# Altium PCB 超声波传感器.PcbDoc
Units mm, origin at the board's own origin, x right, y up, seen from the top; angles counter-clockwise.
Board outline 152.4 x 101.6 mm, 2 copper layers (Top Layer, Bottom Layer); 25 components, 22 nets, 85 pads, 9 vias.
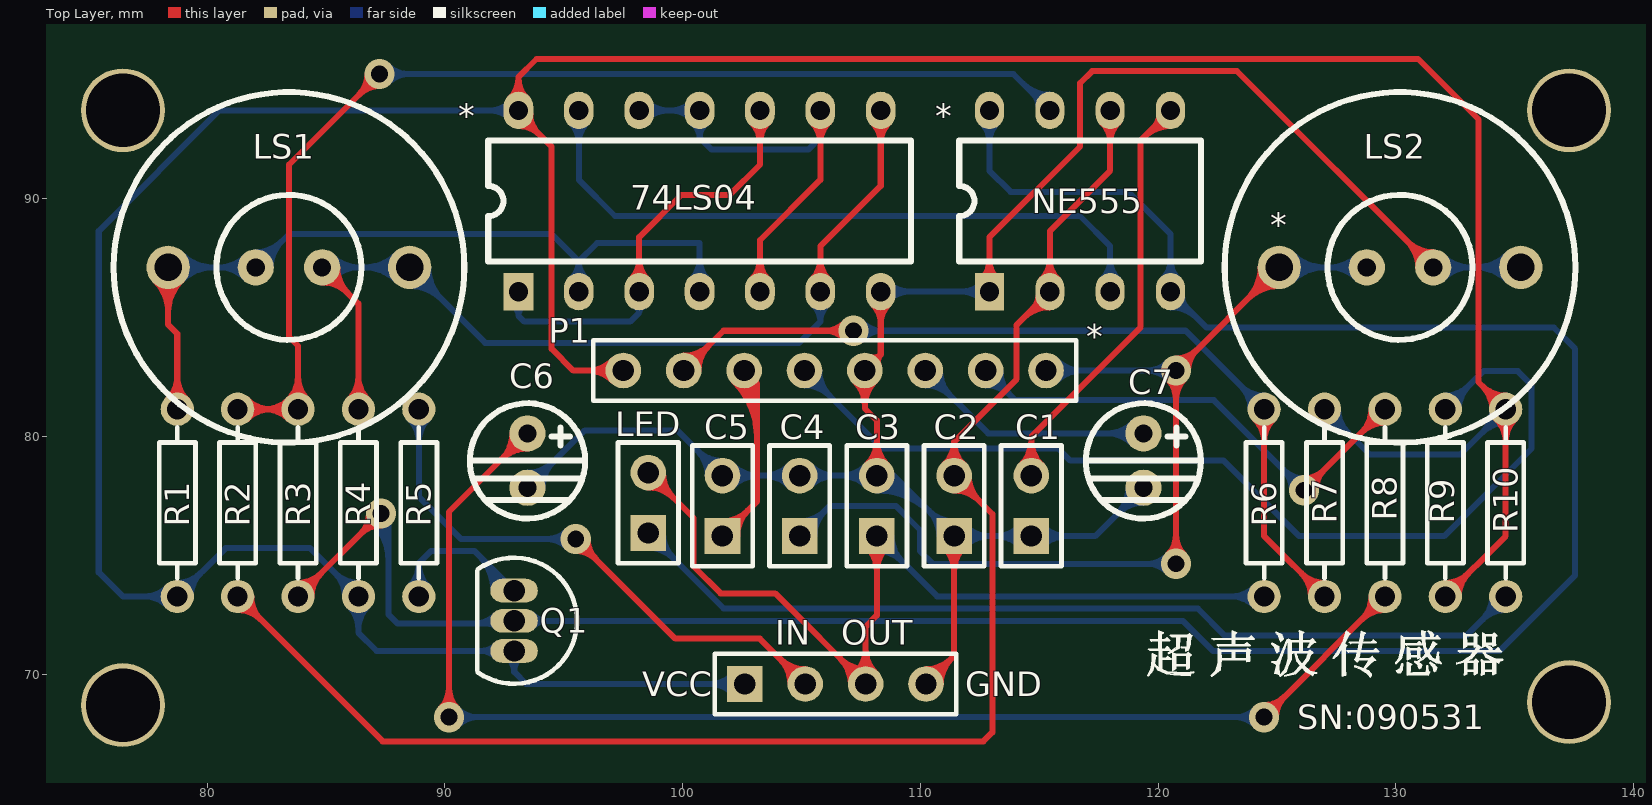
[diagram p0: Top Layer view]
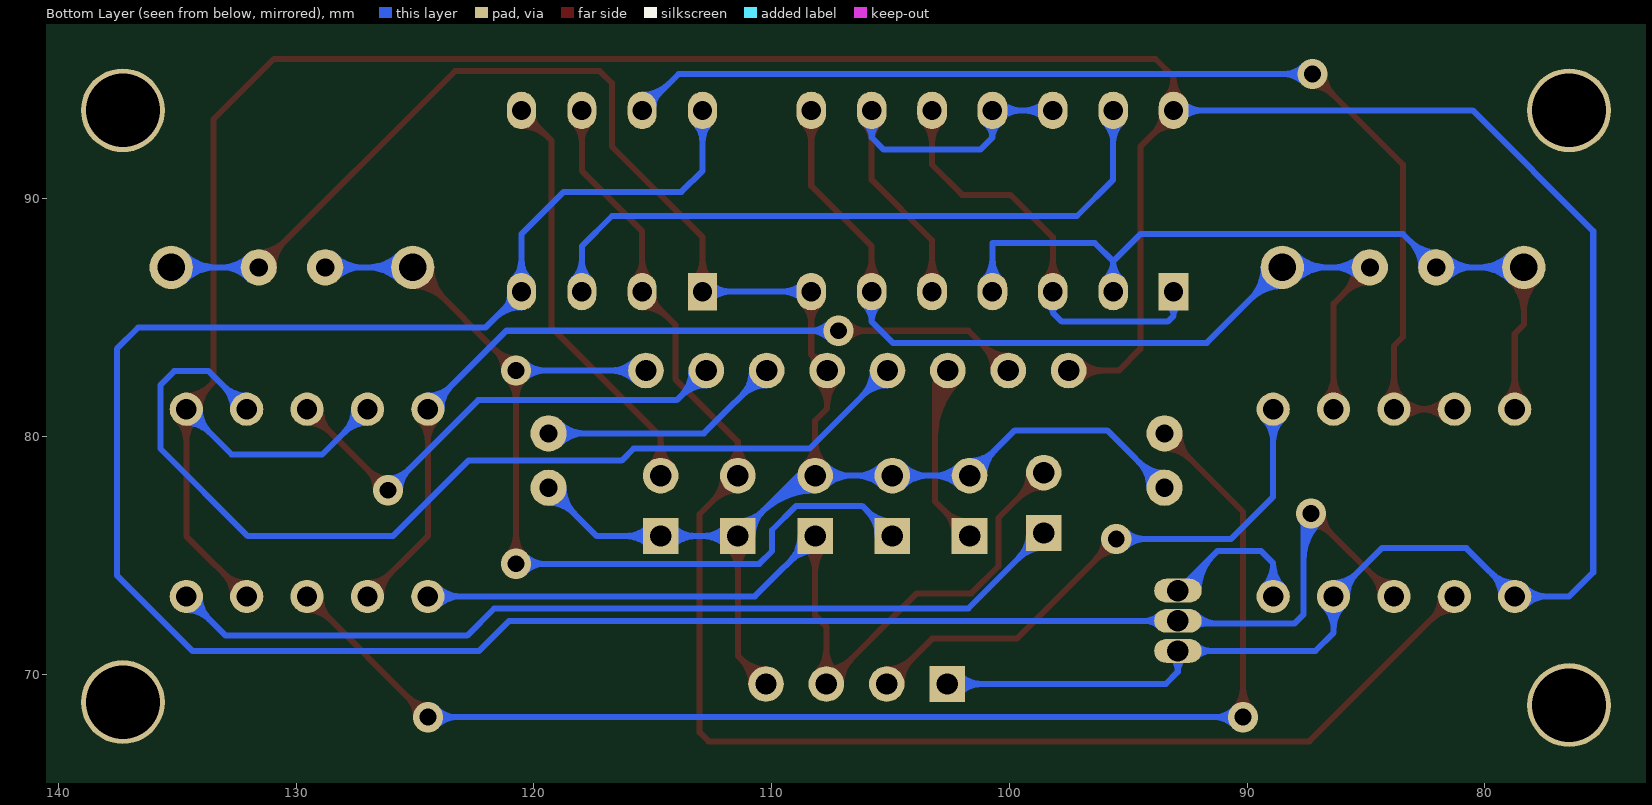
[diagram p1: Bottom Layer view, seen from below]

## Layer stack, top to bottom
Top Layer: signal copper 0.0356
Dielectric: dielectric 0.32, FR-4, Dk 4.8
Bottom Layer: signal copper 0.0356

## Board outline
25.4,25.4 177.8,25.4 177.8,127 25.4,127

## Design rules (kind name [scope] priority, off if disabled: settings)
Clearance [All] p1: gap=0.254
ComponentClearance [All] p1: gap=0.254 collisioncheckmode=3 verticalgap=0.254
PolygonConnect [All] p1: connectstyle=Relief reliefconductorwidth=0.254 reliefentries=4 polygonreliefangle="90 Angle"
RoutingVias [All] p1: holewidth=0.711 width=1.27 viastyle="Through Hole" minholewidth=0.711 minwidth=1.27 maxholewidth=0.711 maxwidth=1.27
SolderMaskExpansion [All] p1: expansion=0.102
TestPointUsage [All] p1: valid=0 allowmultiple=FALSE
Testpoint [All] p1: side=15 testpointundercomponent=TRUE minsize=1.016 maxsize=2.54 preferedsize=1.524 minholesize=0 maxholesize=1.016 preferedholesize=0.813 testpointgrid=0.025 style=1023 order=0-112345678
Width [All] p1: maxlimit=0.254 minlimit=0.254 preferedwidth=0.254
17 further rules are at their usual default settings.

## Components (designator, comment, footprint, x,y, rotation, side; value= is the part's Value field where it differs from the comment)
74LS04 "SN74LS04D" DIP14 93.091,86.106 r90 top (schematic designator U1)
C1 "Cap Semi" CPDR 114.665,77.089 r90 top
C2 "Cap Semi" CPDR 111.417,77.089 r90 top
C3 "Cap Semi" CPDR 108.169,77.089 r90 top
C4 "Cap Semi" CPDR 104.921,77.089 r90 top
C5 "Cap Semi" CPDR 101.673,77.089 r90 top
C6 "Cap Pol3" C-DJ-4 90.932,77.724 r270 top
C7 "Cap Pol3" C-DJ-4 116.84,77.724 r270 top
LED "LED" CPDR 98.552,77.216 r90 top
LS1 "Speaker" CSB 83.439,87.122 r0 top
LS2 "Speaker" CSB 130.175,87.122 r0 top
NE555 "NE555D" DIP8 112.903,86.106 r90 top (schematic designator U2)
P1 "Header 8H" HDR-8 102.616,82.804 r180 top
Q1 "2N3904" SANJG 91.44,74.676 r180 top
R1 "Res2" RSE 78.74,77.216 r270 top
R2 "Res3" RSE 81.28,77.216 r90 top
R3 "Res3" RSE 83.82,77.216 r90 top
R4 "Res2" RSE 86.36,77.216 r90 top
R5 "Res2" RSE 88.9,77.216 r90 top
R6 "Res2" RSE 124.46,77.216 r90 top
R7 "Res2" RSE 127,77.216 r90 top
R8 "Res2" RSE 129.54,77.216 r90 top
R9 "Res2" RSE 132.08,77.216 r90 top
R10 "Res2" RSE 134.62,77.216 r90 top
VCC "Header 4" HDR1X4 102.616,69.596 r0 top (schematic designator P2)

## Footprints (in the part's own frame and the unit in brackets; to place one, negate y for a bottom-side part, rotate by r counter-clockwise, add the part's x,y. Pads: shape width x height; smd on the part's side, far side on the other; paste and mask are expansions set on the pad)
C-DJ-4 [mil]
  round 60 hole 30: 1(-95,100) 2(-5,100)
  silkscreen extent -145,5 46,196
CPDR [mm] "瓷片电容"
  rect 1.5x1.5 hole 0.9: 1(-1.27,0)
  round 1.5 hole 0.9: 2(1.27,0)
  silkscreen extent -2.54,-1.27 2.54,1.27
CSB [mil] "超声波"
  round 60 hole 30: 1(55,0) 2(-55,0)
  round 71.81 hole 45.75: 1(200,0) 2(-200,0)
  silkscreen extent -290,-290 290,290
DIP8 [mil]
  rect 62x48 hole 32: 1(-0.15,-0.04)
  oval 62x48 hole 32: 2(-0.15,-100.04) 3(-0.15,-200.04) 4(-0.15,-300.04) 5(299.85,-300.04) 6(299.85,-200.04) 7(299.85,-100.04) 8(299.85,-0.04)
  silkscreen extent 50,-350 250,50
DIP14 [mil]
  rect 62x49.27 hole 32: 1(-0.15,-0.04)
  oval 62x49.27 hole 32: 2(-0.15,-100.04) 3(-0.15,-200.04) 4(-0.15,-300.04) 5(-0.15,-400.04) 6(-0.15,-500.04) 7(-0.15,-600.04) 8(299.85,-600.04) 9(299.85,-500.04) 10(299.85,-400.04) 11(299.85,-300.04) 12(299.85,-200.04) 13(299.85,-100.04) 14(299.85,-0.04)
  silkscreen extent 50,-650 250,50
HDR1X4 [mm] "Connector; Header; 4 Position"
  rect 1.5x1.5 hole 0.9: 1(0,0)
  round 1.5 hole 0.9: 2(2.54,0) 3(5.08,0) 4(7.62,0)
  silkscreen extent -1.27,-1.27 8.89,1.27
HDR-8 [mm]
  round 1.5 hole 0.9: 1(-12.669,0.023) 2(-10.129,0.023) 3(-7.589,0.023) 4(-5.049,0.023) 5(-2.509,0.023) 6(0.031,0.023) 7(2.571,0.023) 8(5.111,0.023)
  silkscreen extent -13.94,-1.25 6.38,1.29
RSE [mm] "直插电阻1/8W"
  round 1.4 hole 0.85: 1(-3.937,0) 2(3.937,0)
  silkscreen extent -3.17,-0.76 3.17,0.76
SANJG [mm]
  oval 2x1 hole 0.9: 1(-1.468,2.421) 2(-1.468,1.151) 3(-1.468,3.691)
  silkscreen extent -4.11,-0.23 0.08,5.07

## Part data
74LS04: "Hex Inverter"
C1 C2 C3 C4 C5: "Capacitor (Semiconductor SIM Model)"
C6 C7: "Polarized Capacitor (Surface Mount)"
LED: "发光二极管"
LS1 LS2: "Loudspeaker"
NE555: "Precision Timer"
P1: "Header, 8-Pin, Right Angle"
Q1: "NPN General Purpose Amplifier"
R1 R2 R3 R4 R5 R6 R7 R8 R9 R10: "Resistor"
VCC: "Header, 4-Pin"

## Free pads (board coordinates)
  round 3.524 hole 3.1: 0(76.454,68.707) 0(76.454,93.726) 0(137.287,68.834) 0(137.287,93.726)

## Via types
v1: diameter 1.27, hole 0.711, Top Layer to Bottom Layer, 9 vias

## Nets (pads, with @x,y where several pads share a name; then routed paths per layer and width w, separated by ;. In a path a pad name is that pad's centre, name@x,y a point inside that pad or via, vN(x,y) a via of type N, cw(c..) or ccw(c..) an arc to the next point about the centre after c; other vN are vias at no path point)
GND: 74LS04.7 C1.1 C2.1 C3.2 C4.2 C5.2 C6.2 C7.2 LS2.1 NE555.1 P1.4 VCC.4 | length 174.7
  Top Layer w0.254: P1.4@107.224,82.34 cw(c106.161,81.277) 107.665,81.277 cw(c109.169,81.277) P1.4@108.106,82.34 ; P1.4@107.404,82.52 cw(c106.774,81.89) 107.665,81.89 cw(c108.556,81.89) P1.4@107.926,82.52 ; C3.2@107.728,78.8 ccw(c106.665,79.863) 108.169,79.863 ccw(c109.673,79.863) C3.2@108.61,78.8 ; C3.2@107.908,78.62 ccw(c107.278,79.25) 108.169,79.25 ccw(c109.06,79.25) C3.2@108.43,78.62 ; 74LS04.7@107.979,85.588 cw(c107.128,84.736) 108.332,84.736 cw(c109.536,84.736) 74LS04.7@108.685,85.588 ; C3.2 108.169,80.68 107.665,81.184 P1.4 108.332,83.448 ; 74LS04.7 108.332,83.448 ; VCC.4 111.417,70.777 C2.1 ; VCC.4@110.236,69.965 ccw(c110.236,70.856) 110.866,70.226 ccw(c111.496,69.596) VCC.4@110.605,69.596 ; VCC.4@110.236,70.219 ccw(c110.236,71.723) 111.3,70.66 ccw(c112.363,69.596) VCC.4@110.859,69.596 ; C2.1@110.976,75.378 cw(c109.913,74.315) 111.417,74.315 cw(c112.921,74.315) C2.1@111.858,75.378 ; C2.1@111.156,75.558 cw(c110.526,74.928) 111.417,74.928 cw(c112.308,74.928) C2.1@111.678,75.558 ; NE555.1@112.563,86.621 ccw(c111.739,87.445) 112.904,87.445 ccw(c114.069,87.445) NE555.1@113.245,86.621 ; NE555.1 112.904,88.393 116.713,92.202 116.713,94.869 117.221,95.377 123.317,95.377 LS2.1@131.572,87.122 ; LS2.1@130.937,87.122 ccw(c129.404,87.122) 130.488,88.206 ccw(c131.572,89.29) LS2.1@131.572,87.757 ; LS2.1@131.191,87.122 ccw(c130.271,87.122) 130.922,87.772 ccw(c131.572,88.423) LS2.1@131.572,87.503 ; 108.332,83.448 cw(c108.047,83.733) 107.897,83.359 ccw(c108.047,83.733) 108.332,83.448 ; 108.332,83.448 ccw(c108.617,83.163) 108.243,83.013 cw(c108.617,83.163) 108.332,83.448
  Bottom Layer w0.254: C6.2 95.885,80.264 99.768,80.264 C5.2 C4.2 C3.2 108.877,78.359 C2.1 C1.1 117.348,75.819 C7.2 ; C6.2@93.472,78.232 ccw(c93.472,79.152) 94.122,78.501 ccw(c94.773,77.851) C6.2@93.853,77.851 ; C6.2@93.472,78.486 ccw(c93.472,80.019) 94.556,78.935 ccw(c95.64,77.851) C6.2@94.107,77.851 ; C5.2@101.05,78.359 ccw(c99.546,78.359) 100.609,79.423 ccw(c101.673,80.486) C5.2@101.673,78.982 ; C5.2@101.304,78.359 ccw(c100.413,78.359) 101.043,78.989 ccw(c101.673,79.619) C5.2@101.673,78.728 ; C5.2@101.934,78.098 cw(c102.564,77.468) 102.564,78.359 cw(c102.564,79.25) C5.2@101.934,78.62 ; C5.2@102.114,77.918 cw(c103.177,76.855) 103.177,78.359 cw(c103.177,79.863) C5.2@102.114,78.8 ; C4.2@104.48,77.918 ccw(c103.417,76.855) 103.417,78.359 ccw(c103.417,79.863) C4.2@104.48,78.8 ; C4.2@104.66,78.098 ccw(c104.03,77.468) 104.03,78.359 ccw(c104.03,79.25) C4.2@104.66,78.62 ; C4.2@105.182,78.098 cw(c105.812,77.468) 105.812,78.359 cw(c105.812,79.25) C4.2@105.182,78.62 ; C4.2@105.362,77.918 cw(c106.425,76.855) 106.425,78.359 cw(c106.425,79.863) C4.2@105.362,78.8 ; C3.2@107.728,77.918 ccw(c106.665,76.855) 106.665,78.359 ccw(c106.665,79.863) C3.2@107.728,78.8 ; C3.2@107.908,78.098 ccw(c107.278,77.468) 107.278,78.359 ccw(c107.278,79.25) C3.2@107.908,78.62 ; 74LS04.7 NE555.1 ; 74LS04.7@108.685,85.75 cw(c109.536,84.898) 109.536,86.102 cw(c109.536,87.306) 74LS04.7@108.685,86.455 ; C2.1@110.794,75.819 ccw(c109.29,75.819) 110.353,76.883 ccw(c111.417,77.946) C2.1@111.417,76.442 ; C2.1@111.048,75.819 ccw(c110.157,75.819) 110.787,76.449 ccw(c111.417,77.079) C2.1@111.417,76.188 ; C2.1@111.678,75.558 cw(c112.308,74.928) 112.308,75.819 cw(c112.308,76.71) C2.1@111.678,76.08 ; C2.1@111.858,75.378 cw(c112.921,74.315) 112.921,75.819 cw(c112.921,77.323) C2.1@111.858,76.26 ; NE555.1@112.563,85.761 ccw(c111.739,84.937) 111.739,86.102 ccw(c111.739,87.267) NE555.1@112.563,86.443 ; C1.1@114.224,75.378 ccw(c113.161,74.315) 113.161,75.819 ccw(c113.161,77.323) C1.1@114.224,76.26 ; C1.1@114.404,75.558 ccw(c113.774,74.928) 113.774,75.819 ccw(c113.774,76.71) C1.1@114.404,76.08 ; C1.1@114.926,75.558 cw(c115.556,74.928) 115.556,75.819 cw(c115.556,76.71) C1.1@114.926,76.08 ; C1.1@115.106,75.378 cw(c116.169,74.315) 116.169,75.819 cw(c116.169,77.323) C1.1@115.106,76.26 ; C7.2@118.745,77.851 cw(c117.212,77.851) 118.296,76.767 cw(c119.38,75.683) C7.2@119.38,77.216 ; C7.2@118.999,77.851 cw(c118.079,77.851) 118.73,77.201 cw(c119.38,76.55) C7.2@119.38,77.47 ; LS2.1@131.572,87.122 LS2.1@135.255,87.122 ; LS2.1@131.841,86.853 cw(c132.492,86.202) 132.492,87.122 cw(c132.492,88.042) LS2.1@131.841,87.391 ; LS2.1@132.021,86.673 cw(c133.105,85.589) 133.105,87.122 cw(c133.105,88.655) LS2.1@132.021,87.571 ; LS2.1@134.7,86.567 ccw(c133.36,85.227) 133.36,87.122 ccw(c133.36,89.017) LS2.1@134.7,87.677 ; LS2.1@134.88,86.747 ccw(c133.973,85.84) 133.973,87.122 ccw(c133.973,88.404) LS2.1@134.88,87.497 ; C3.2@108.169,77.736 cw(c108.169,74.523) 110.441,76.795 ccw(c108.169,74.523) C3.2@108.169,77.736 ; C3.2@108.169,77.99 cw(c108.169,75.39) 110.008,77.228 ccw(c108.169,75.39) C3.2@108.169,77.99 ; C3.2@108.169,78.244 cw(c108.169,76.257) 109.574,77.662 ccw(c108.169,76.257) C3.2@108.169,78.244 ; C3.2@108.169,78.498 cw(c108.169,77.124) 109.14,78.096 ccw(c108.169,77.124) C3.2@108.169,78.498
NetC1_2: C1.2 NE555.5 | length 24.2
  Top Layer w0.254: C1.2@114.224,78.8 ccw(c113.161,79.863) 114.665,79.863 ccw(c116.169,79.863) C1.2@115.106,78.8 ; C1.2@114.404,78.62 ccw(c113.774,79.25) 114.665,79.25 ccw(c115.556,79.25) C1.2@114.926,78.62 ; C1.2 114.665,79.994 119.253,84.582 119.253,92.451 NE555.5 ; 119.397,92.595 cw(c120.524,91.467) NE555.5@120.524,93.062 ; 119.826,93.024 ccw(c119.306,93.544) NE555.5@120.041,93.544 ; 119.83,93.028 cw(c120.524,92.335) NE555.5@120.524,93.316
NetC2_2: C2.2 NE555.2 NE555.6 R2.1 | length 80.9
  Top Layer w0.254: R2.1@81.28,72.706 cw(c81.28,71.323) 82.258,72.301 cw(c83.236,73.279) R2.1@81.853,73.279 ; R2.1@81.28,72.96 cw(c81.28,72.19) 81.825,72.734 cw(c82.369,73.279) R2.1@81.599,73.279 ; R2.1 87.376,67.183 112.649,67.183 113.03,67.564 113.03,76.746 C2.2 111.417,79.794 ; C2.2@110.992,78.814 ccw(c110.076,79.794) 111.417,79.794 ; C2.2@111.165,78.629 ccw(c110.623,79.209) 111.417,79.209 ccw(c112.211,79.209) C2.2@111.669,78.629 ; C2.2@111.417,77.736 cw(c111.417,76.232) 112.481,77.295 cw(c113.544,78.359) C2.2@112.04,78.359 ; C2.2@111.417,77.99 cw(c111.417,77.099) 112.047,77.729 cw(c112.677,78.359) C2.2@111.786,78.359 ; C2.2@111.842,78.814 cw(c112.758,79.794) 111.417,79.794 ; 114.317,84.975 cw(c115.444,83.847) NE555.2@115.444,85.442 ; 114.746,85.404 ccw(c114.226,85.924) NE555.2@114.961,85.924 ; 114.75,85.408 cw(c115.444,84.715) NE555.2@115.444,85.696 ; NE555.2@115.103,86.621 ccw(c114.279,87.445) 115.444,87.445 ccw(c116.609,87.445) NE555.2@115.785,86.621 ; NE555.6@117.643,93.203 cw(c116.819,92.379) 117.984,92.379 cw(c119.149,92.379) NE555.6@118.325,93.203 ; NE555.6 117.984,91.187 115.444,88.647 NE555.2 114.046,84.704 114.046,82.423 111.417,79.794
NetC3_1: C3.1 LED.2 R6.1 VCC.3 | length 60
  Top Layer w0.254: LED.2@98.552,77.863 cw(c98.552,76.359) 99.616,77.422 cw(c100.679,78.486) LED.2@99.175,78.486 ; LED.2@98.552,78.117 cw(c98.552,77.226) 99.182,77.856 cw(c99.812,78.486) LED.2@98.921,78.486 ; LED.2 100.457,76.581 100.457,74.549 101.6,73.406 103.886,73.406 VCC.3 107.696,72.009 108.169,72.482 C3.1 ; VCC.3@107.073,69.596 ccw(c105.569,69.596) 106.632,70.66 ccw(c107.696,71.723) VCC.3@107.696,70.219 ; VCC.3@107.255,70.037 ccw(c106.192,71.1) 107.696,71.1 ccw(c109.2,71.1) VCC.3@108.137,70.037 ; VCC.3@107.327,69.596 ccw(c106.436,69.596) 107.066,70.226 ccw(c107.696,70.856) VCC.3@107.696,69.965 ; VCC.3@107.435,69.857 ccw(c106.805,70.487) 107.696,70.487 ccw(c108.587,70.487) VCC.3@107.957,69.857 ; C3.1@107.728,75.378 cw(c106.665,74.315) 108.169,74.315 cw(c109.673,74.315) C3.1@108.61,75.378 ; C3.1@107.908,75.558 cw(c107.278,74.928) 108.169,74.928 cw(c109.06,74.928) C3.1@108.43,75.558
  Bottom Layer w0.254: C3.1@108.169,75.196 cw(c108.169,73.692) 109.233,74.755 cw(c110.296,75.819) C3.1@108.792,75.819 ; C3.1@108.169,75.45 cw(c108.169,74.559) 108.799,75.189 cw(c109.429,75.819) C3.1@108.538,75.819 ; C3.1 110.709,73.279 R6.1 ; R6.1@124.055,72.874 ccw(c123.077,71.896) 123.077,73.279 ccw(c123.077,74.662) R6.1@124.055,73.684 ; R6.1@124.234,73.053 ccw(c123.69,72.509) 123.69,73.279 ccw(c123.69,74.049) R6.1@124.234,73.505
NetC4_1: C4.1 LS2.2 P1.1 | length 72.3
  Top Layer w0.254: v1@120.395,75.012 ccw(c119.528,75.879) 120.754,75.879 ccw(c121.98,75.879) v1@121.113,75.012 ; v1@120.395,82.422 cw(c119.528,81.555) 120.754,81.555 cw(c121.98,81.555) v1@121.113,82.422 ; v1(120.754,74.653) v1(120.754,82.781) LS2.2@125.095,87.122 ; v1@120.754,83.289 ccw(c120.754,84.515) 121.621,83.648 ccw(c122.488,82.781) v1@121.262,82.781 ; LS2.2@124.31,87.122 cw(c122.415,87.122) 123.755,85.782 cw(c125.095,84.442) LS2.2@125.095,86.337 ; LS2.2@124.564,87.122 cw(c123.282,87.122) 124.189,86.216 cw(c125.095,85.309) LS2.2@125.095,86.591
  Bottom Layer w0.254: C4.1 106.191,77.089 108.966,77.089 109.982,76.073 109.982,75.184 110.513,74.653 v1(120.754,74.653) ; C4.1@104.921,76.188 ccw(c104.921,77.079) 105.551,76.449 ccw(c106.181,75.819) C4.1@105.29,75.819 ; C4.1@104.921,76.442 ccw(c104.921,77.946) 105.985,76.883 ccw(c107.048,75.819) C4.1@105.544,75.819 ; P1.1 v1(120.754,82.781) ; P1.1@115.546,82.52 cw(c116.176,81.89) 116.176,82.781 cw(c116.176,83.672) P1.1@115.546,83.042 ; P1.1@115.726,82.34 cw(c116.789,81.277) 116.789,82.781 cw(c116.789,84.285) P1.1@115.726,83.222 ; v1@120.395,74.294 ccw(c119.528,73.427) 119.528,74.653 ccw(c119.528,75.879) v1@120.395,75.012 ; v1@120.395,82.422 ccw(c119.528,81.555) 119.528,82.781 ccw(c119.528,84.007) v1@120.395,83.14 ; LS2.2@125.095,87.122 LS2.2@128.778,87.122 ; LS2.2@125.47,86.747 cw(c126.377,85.84) 126.377,87.122 cw(c126.377,88.404) LS2.2@125.47,87.497 ; LS2.2@125.65,86.567 cw(c126.99,85.227) 126.99,87.122 cw(c126.99,89.017) LS2.2@125.65,87.677 ; LS2.2@128.329,86.673 ccw(c127.245,85.589) 127.245,87.122 ccw(c127.245,88.655) LS2.2@128.329,87.571 ; LS2.2@128.509,86.853 ccw(c127.858,86.202) 127.858,87.122 ccw(c127.858,88.042) LS2.2@128.509,87.391
NetC5_1: C5.1 P1.6 | length 20
  Top Layer w0.254: C5.1 103.124,77.27 103.124,82.242 ; C5.1@101.673,76.188 ccw(c101.673,77.079) 102.303,76.449 ccw(c102.933,75.819) C5.1@102.042,75.819 ; C5.1@101.673,76.442 ccw(c101.673,77.946) 102.737,76.883 ccw(c103.8,75.819) C5.1@102.296,75.819 ; P1.6@102.144,82.34 cw(c99.78,79.976) 103.124,79.976 ; P1.6@102.324,82.52 cw(c100.393,80.589) 103.124,80.589 ; P1.6@102.504,82.7 cw(c101.006,81.202) 103.124,81.202 ; P1.6 103.124,82.242 ; P1.6@102.683,82.879 cw(c101.619,81.815) 103.124,81.815 ; 103.124,82.242 cw(c103.233,82.351) 103.104,82.437 ccw(c103.233,82.351) 103.124,82.242 ; 103.124,82.242 ccw(c103.015,82.133) 102.929,82.262 cw(c103.015,82.133) 103.124,82.242
NetC6_1: C6.1 R8.1 | length 69.7
  Top Layer w0.254: v1@89.811,68.558 ccw(c88.944,69.425) 90.17,69.425 ccw(c91.396,69.425) v1@90.529,68.558 ; v1(90.17,68.199) 90.17,76.835 C6.1 ; C6.1@92.837,80.137 cw(c91.304,80.137) 92.388,79.053 cw(c93.472,77.969) C6.1@93.472,79.502 ; C6.1@93.091,80.137 cw(c92.171,80.137) 92.822,79.487 cw(c93.472,78.836) C6.1@93.472,79.756 ; v1(124.46,68.199) R8.1 ; v1@124.46,68.707 ccw(c124.46,69.933) 125.327,69.066 ccw(c126.194,68.199) v1@124.968,68.199 ; R8.1@128.967,73.279 cw(c127.584,73.279) 128.562,72.301 cw(c129.54,71.323) R8.1@129.54,72.706 ; R8.1@129.221,73.279 cw(c128.451,73.279) 128.995,72.734 cw(c129.54,72.19) R8.1@129.54,72.96
  Bottom Layer w0.254: v1(90.17,68.199) v1(124.46,68.199) ; v1@90.529,67.84 cw(c91.396,66.973) 91.396,68.199 cw(c91.396,69.425) v1@90.529,68.558 ; v1@124.101,67.84 ccw(c123.234,66.973) 123.234,68.199 ccw(c123.234,69.425) v1@124.101,68.558
NetC7_1: C7.1 P1.3 | length 17.9
  Bottom Layer w0.254: P1.3@110.205,82.158 cw(c110.205,80.654) 111.269,81.717 cw(c112.332,82.781) P1.3@110.828,82.781 ; P1.3@110.205,82.412 cw(c110.205,81.521) 110.835,82.151 cw(c111.465,82.781) P1.3@110.574,82.781 ; P1.3 112.849,80.137 C7.1 ; C7.1@118.931,79.688 ccw(c117.847,78.604) 117.847,80.137 ccw(c117.847,81.67) C7.1@118.931,80.586 ; C7.1@119.111,79.868 ccw(c118.46,79.217) 118.46,80.137 ccw(c118.46,81.057) C7.1@119.111,80.406
NetLED_1: LED.1 R10.1 | length 45.7
  Bottom Layer w0.254: LED.1@98.552,75.323 cw(c98.552,73.819) 99.616,74.882 cw(c100.679,75.946) LED.1@99.175,75.946 ; LED.1@98.552,75.577 cw(c98.552,74.686) 99.182,75.316 cw(c99.812,75.946) LED.1@98.921,75.946 ; LED.1 101.727,72.771 121.666,72.771 122.809,71.628 132.969,71.628 R10.1 ; R10.1@134.047,73.279 cw(c132.664,73.279) 133.642,72.301 cw(c134.62,71.323) R10.1@134.62,72.706 ; R10.1@134.301,73.279 cw(c133.531,73.279) 134.075,72.734 cw(c134.62,72.19) R10.1@134.62,72.96
NetLS1_1: 74LS04.6 74LS04.8 LS1.1 R4.2 | length 65.7
  Top Layer w0.254: LS1.1@84.836,86.487 cw(c84.836,84.954) 85.92,86.038 cw(c87.004,87.122) LS1.1@85.471,87.122 ; LS1.1@84.836,86.741 cw(c84.836,85.821) 85.486,86.472 cw(c86.137,87.122) LS1.1@85.217,87.122 ; LS1.1@84.836,87.122 86.36,85.598 R4.2 ; R4.2@85.955,81.558 ccw(c84.977,82.536) 86.36,82.536 ccw(c87.743,82.536) R4.2@86.765,81.558 ; R4.2@86.134,81.379 ccw(c85.59,81.923) 86.36,81.923 ccw(c87.13,81.923) R4.2@86.586,81.379 ; 74LS04.6@105.439,86.617 ccw(c104.588,87.468) 105.792,87.468 ccw(c106.996,87.468) 74LS04.6@106.145,86.617 ; 74LS04.6 105.792,88.012 108.332,90.552 74LS04.8 ; 74LS04.8@107.979,93.208 cw(c107.128,92.356) 108.332,92.356 cw(c109.536,92.356) 74LS04.8@108.685,93.208
  Bottom Layer w0.254: LS1.1@84.836,87.122 88.519,87.122 91.694,83.947 104.902,83.947 105.792,84.837 ; LS1.1@85.105,86.853 cw(c85.756,86.202) 85.756,87.122 cw(c85.756,88.042) LS1.1@85.105,87.391 ; LS1.1@85.285,86.673 cw(c86.369,85.589) 86.369,87.122 cw(c86.369,88.655) LS1.1@85.285,87.571 ; LS1.1@87.964,86.567 ccw(c86.624,85.227) 86.624,87.122 ccw(c86.624,89.017) LS1.1@87.964,87.677 ; LS1.1@88.144,86.747 ccw(c87.237,85.84) 87.237,87.122 ccw(c87.237,88.404) LS1.1@88.144,87.497 ; LS1.1@88.519,86.337 cw(c88.519,84.442) 89.859,85.782 cw(c91.199,87.122) LS1.1@89.304,87.122 ; LS1.1@88.519,86.591 cw(c88.519,85.309) 89.425,86.216 cw(c90.332,87.122) LS1.1@89.05,87.122 ; 74LS04.6@105.462,85.566 cw(c104.821,84.837) 105.792,84.837 ; 74LS04.6 105.792,84.837 ; 74LS04.6@106.122,85.566 ccw(c106.763,84.837) 105.792,84.837
NetLS1_2: 74LS04.2 74LS04.4 LS1.2 R1.1 | length 57.8
  Top Layer w0.254: LS1.2@77.804,86.567 cw(c76.464,85.227) 78.359,85.227 cw(c80.254,85.227) LS1.2@78.914,86.567 ; LS1.2@77.984,86.747 cw(c77.077,85.84) 78.359,85.84 cw(c79.641,85.84) LS1.2@78.734,86.747 ; R1.1@78.335,81.558 ccw(c77.357,82.536) 78.74,82.536 ccw(c80.123,82.536) R1.1@79.145,81.558 ; LS1.2@78.359,87.122 78.359,84.709 78.74,84.328 R1.1 ; R1.1@78.514,81.379 ccw(c77.97,81.923) 78.74,81.923 ccw(c79.51,81.923) R1.1@78.966,81.379
  Bottom Layer w0.254: LS1.2@78.359,87.122 82.042,87.122 83.439,88.519 94.489,88.519 95.632,87.376 ; LS1.2@78.734,86.747 cw(c79.641,85.84) 79.641,87.122 cw(c79.641,88.404) LS1.2@78.734,87.497 ; LS1.2@78.914,86.567 cw(c80.254,85.227) 80.254,87.122 cw(c80.254,89.017) LS1.2@78.914,87.677 ; LS1.2@81.593,86.673 ccw(c80.509,85.589) 80.509,87.122 ccw(c80.509,88.655) LS1.2@81.593,87.571 ; LS1.2@81.773,86.853 ccw(c81.122,86.202) 81.122,87.122 ccw(c81.122,88.042) LS1.2@81.773,87.391 ; LS1.2@82.042,87.503 ccw(c82.042,88.423) 82.692,87.772 ccw(c83.343,87.122) LS1.2@82.423,87.122 ; LS1.2@82.042,87.757 ccw(c82.042,89.29) 83.126,88.206 ccw(c84.21,87.122) LS1.2@82.677,87.122 ; 74LS04.2@95.3,86.636 ccw(c94.641,87.376) 95.632,87.376 ; 74LS04.2 95.632,87.376 ; 74LS04.2@95.964,86.636 cw(c96.623,87.376) 95.632,87.376 ; 74LS04.4@100.359,86.617 ccw(c99.508,87.468) 100.712,87.468 ccw(c101.916,87.468) 74LS04.4@101.065,86.617 ; 74LS04.4 100.712,88.137 100.71,88.139 96.395,88.139 95.632,87.376
NetP1_2: P1.2 R8.2 | length 31.3
  Top Layer w0.254: v1(126.131,77.744) R8.2 ; v1@126.131,78.252 ccw(c126.131,79.479) 126.998,78.611 ccw(c127.866,77.744) v1@126.639,77.744 ; R8.2@128.967,81.153 cw(c127.584,81.153) 128.562,80.175 cw(c129.54,79.197) R8.2@129.54,80.58 ; R8.2@129.221,81.153 cw(c128.451,81.153) 128.995,80.608 cw(c129.54,80.064) R8.2@129.54,80.834
  Bottom Layer w0.254: P1.2@112.745,82.158 cw(c112.745,80.654) 113.809,81.717 cw(c114.872,82.781) P1.2@113.368,82.781 ; P1.2@112.745,82.412 cw(c112.745,81.521) 113.375,82.151 cw(c114.005,82.781) P1.2@113.114,82.781 ; P1.2 113.992,81.534 122.341,81.534 v1(126.131,77.744) ; v1@125.623,77.744 ccw(c124.397,77.744) 125.264,78.611 ccw(c126.131,79.479) v1@126.131,78.252
NetP1_5: P1.5 R9.2 | length 49.3
  Bottom Layer w0.254: P1.5@105.125,82.158 cw(c105.125,80.654) 106.189,81.717 cw(c107.252,82.781) P1.5@105.748,82.781 ; P1.5@105.125,82.412 cw(c105.125,81.521) 105.755,82.151 cw(c106.385,82.781) P1.5@105.494,82.781 ; P1.5 108.404,79.502 115.799,79.502 116.307,78.994 122.758,78.994 125.933,75.819 132.029,75.819 135.712,79.502 135.712,82.169 135.128,82.753 133.68,82.753 R9.2 ; R9.2@132.08,81.472 ccw(c132.08,82.242) 132.625,81.698 ccw(c133.169,81.153) R9.2@132.399,81.153 ; R9.2@132.08,81.726 ccw(c132.08,83.109) 133.058,82.131 ccw(c134.036,81.153) R9.2@132.653,81.153
NetP1_7: P1.7 R6.2 R7.1 | length 53.2
  Top Layer w0.254: P1.7 101.719,84.455 v1(107.188,84.455) ; P1.7@100.045,83.15 ccw(c100.045,84.041) 100.675,83.411 ccw(c101.305,82.781) P1.7@100.414,82.781 ; P1.7@100.045,83.404 ccw(c100.045,84.908) 101.109,83.845 ccw(c102.172,82.781) P1.7@100.668,82.781 ; v1@106.829,84.096 ccw(c105.962,83.229) 105.962,84.455 ccw(c105.962,85.681) v1@106.829,84.814 ; R6.2@124.055,80.748 cw(c123.077,79.77) 124.46,79.77 cw(c125.843,79.77) R6.2@124.865,80.748 ; R6.2@124.234,80.927 cw(c123.69,80.383) 124.46,80.383 cw(c125.23,80.383) R6.2@124.686,80.927 ; R6.2 124.46,75.819 R7.1 ; R7.1@126.427,73.279 ccw(c125.044,73.279) 126.022,74.257 ccw(c127,75.235) R7.1@127,73.852 ; R7.1@126.681,73.279 ccw(c125.911,73.279) 126.455,73.824 ccw(c127,74.368) R7.1@127,73.598
  Bottom Layer w0.254: v1(107.188,84.455) 121.158,84.455 R6.2 ; v1@107.547,84.096 cw(c108.414,83.229) 108.414,84.455 cw(c108.414,85.681) v1@107.547,84.814 ; R6.2@123.887,81.153 ccw(c122.504,81.153) 123.482,82.131 ccw(c124.46,83.109) R6.2@124.46,81.726 ; R6.2@124.141,81.153 ccw(c123.371,81.153) 123.915,81.698 ccw(c124.46,82.242) R6.2@124.46,81.472
NetP2_2: R5.2 VCC.2 | length 34.2
  Top Layer w0.254: v1@95.504,75.184 cw(c95.504,73.958) 96.371,74.825 cw(c97.238,75.692) v1@96.012,75.692 ; v1(95.504,75.692) 99.695,71.501 103.251,71.501 VCC.2 ; VCC.2@104.533,69.596 ccw(c103.029,69.596) 104.092,70.66 ccw(c105.156,71.723) VCC.2@105.156,70.219 ; VCC.2@104.787,69.596 ccw(c103.896,69.596) 104.526,70.226 ccw(c105.156,70.856) VCC.2@105.156,69.965
  Bottom Layer w0.254: R5.2@88.495,80.748 cw(c87.517,79.77) 88.9,79.77 cw(c90.283,79.77) R5.2@89.305,80.748 ; R5.2@88.674,80.927 cw(c88.13,80.383) 88.9,80.383 cw(c89.67,80.383) R5.2@89.126,80.927 ; R5.2 88.9,77.47 90.678,75.692 v1(95.504,75.692) ; v1@95.145,75.333 ccw(c94.278,74.466) 94.278,75.692 ccw(c94.278,76.918) v1@95.145,76.051
NetQ1_1: NE555.4 NE555.8 Q1.1 R3.1 | length 121.4
  Top Layer w0.254: R3.1 v1(87.312,76.772) ; R3.1@83.82,73.598 ccw(c83.82,74.368) 84.365,73.824 ccw(c84.909,73.279) R3.1@84.139,73.279 ; R3.1@83.82,73.852 ccw(c83.82,75.235) 84.798,74.257 ccw(c85.776,73.279) R3.1@84.393,73.279 ; v1@86.804,76.772 cw(c85.578,76.772) 86.445,75.904 cw(c87.312,75.037) v1@87.312,76.263
  Bottom Layer w0.254: v1@86.953,76.412 cw(c85.32,74.779) 87.63,74.779 ; v1@87.133,76.592 cw(c85.933,75.392) 87.63,75.392 ; 87.63,76.005 ccw(c86.546,76.005) v1(87.312,76.772) 87.63,76.454 87.63,72.517 88.011,72.136 92.789,72.136 Q1.1 121.039,72.255 122.301,70.993 134.366,70.993 137.541,74.168 137.541,83.693 136.652,84.582 122.044,84.582 NE555.4 120.524,88.518 118.745,90.297 113.792,90.297 112.904,91.185 NE555.8 ; 91.219,72.136 ccw(c91.219,73.444) Q1.1@92.144,72.519 ; 91.795,72.136 cw(c91.795,71.643) Q1.1@92.144,71.992 ; 91.833,72.136 ccw(c91.833,72.831) Q1.1@92.324,72.339 ; Q1.1@93.672,71.992 cw(c94.308,71.355) 94.308,72.255 cw(c94.308,73.156) Q1.1@93.672,72.519 ; NE555.8@112.563,93.203 cw(c111.739,92.379) 112.904,92.379 cw(c114.069,92.379) NE555.8@113.245,93.203 ; NE555.4@120.183,86.621 ccw(c119.359,87.445) 120.524,87.445 ccw(c121.689,87.445) NE555.4@120.865,86.621 ; NE555.4@120.524,85.442 cw(c120.524,83.847) 121.651,84.975 ; NE555.4@120.524,85.696 cw(c120.524,84.715) 121.218,85.408 ; NE555.4@121.007,85.924 ccw(c121.742,85.924) 121.222,85.404
NetQ1_2: Q1.2 R5.1 | length 13.2
  Bottom Layer w0.254: R5.1@88.495,73.684 ccw(c87.517,74.662) 88.9,74.662 ccw(c90.283,74.662) R5.1@89.305,73.684 ; R5.1@88.674,73.505 ccw(c88.13,74.049) 88.9,74.049 ccw(c89.67,74.049) R5.1@89.126,73.505 ; R5.1 88.9,74.676 89.408,75.184 91.249,75.184 Q1.2 ; 91.418,75.016 cw(c89.927,73.525) Q1.2@92.035,73.525 ; 91.851,74.582 cw(c90.794,73.525) Q1.2@92.289,73.525 ; 92.285,74.148 cw(c91.662,73.525) Q1.2@92.543,73.525
NetR2_2: NE555.7 R2.2 R3.2 | length 63.8
  Top Layer w0.254: R2.2 R3.2 83.82,83.82 83.439,84.201 83.439,91.44 v1(87.249,95.25) ; R2.2@81.506,80.927 cw(c82.05,80.383) 82.05,81.153 cw(c82.05,81.923) R2.2@81.506,81.379 ; R2.2@81.685,80.748 cw(c82.663,79.77) 82.663,81.153 cw(c82.663,82.536) R2.2@81.685,81.558 ; R3.2@83.415,80.748 ccw(c82.437,79.77) 82.437,81.153 ccw(c82.437,82.536) 83.415,81.558 ccw(c82.437,82.536) 83.82,82.536 ccw(c85.203,82.536) R3.2@84.225,81.558 ; R3.2@83.594,80.927 ccw(c83.05,80.383) 83.05,81.153 ccw(c83.05,81.923) 83.594,81.379 ccw(c83.05,81.923) 83.82,81.923 ccw(c84.59,81.923) R3.2@84.046,81.379 ; v1@86.741,95.25 cw(c85.515,95.25) 86.382,94.383 cw(c87.249,93.516) v1@87.249,94.742
  Bottom Layer w0.254: v1(87.249,95.25) 113.916,95.25 NE555.7 ; v1@87.608,94.891 cw(c88.475,94.024) 88.475,95.25 cw(c88.475,96.476) v1@87.608,95.609 ; 114.317,94.85 ccw(c115.444,95.977) NE555.7@115.444,94.383 ; 114.746,94.42 cw(c114.226,93.9) NE555.7@114.961,93.9 ; 114.75,94.416 ccw(c115.444,95.11) NE555.7@115.444,94.129
NetU1_1: 74LS04.1 74LS04.3 74LS04.10 | length 25.3
  Top Layer w0.254: 74LS04.3@97.819,86.617 ccw(c96.968,87.468) 98.172,87.468 ccw(c99.376,87.468) 74LS04.3@98.525,86.617 ; 74LS04.3 98.172,88.393 99.95,90.171 101.983,90.171 103.252,91.44 74LS04.10 ; 74LS04.10@102.899,93.208 cw(c102.048,92.356) 103.252,92.356 cw(c104.456,92.356) 74LS04.10@103.605,93.208
  Bottom Layer w0.254: 74LS04.1 93.092,85.089 ; 74LS04.3 98.172,85.219 ; 93.092,85.089 cw(c93.57,85.089) 93.336,85.506 ccw(c93.57,85.089) 93.092,85.089 ; 93.092,85.089 ccw(c92.614,85.089) 92.848,85.506 cw(c92.614,85.089) 93.092,85.089 ; 93.092,85.089 93.344,84.837 97.79,84.837 98.172,85.219 ; 98.172,85.219 cw(c98.444,85.219) 98.348,85.474 ccw(c98.444,85.219) 98.172,85.219 ; 98.172,85.219 ccw(c97.9,85.219) 97.996,85.474 cw(c97.9,85.219) 98.172,85.219
NetU1_5: 74LS04.5 74LS04.9 74LS04.11 74LS04.12 | length 31.9
  Top Layer w0.254: 74LS04.5@102.899,86.617 ccw(c102.048,87.468) 103.252,87.468 ccw(c104.456,87.468) 74LS04.5@103.605,86.617 ; 74LS04.5 103.252,88.266 105.792,90.806 74LS04.9 ; 74LS04.9@105.439,93.208 cw(c104.588,92.356) 105.792,92.356 cw(c106.996,92.356) 74LS04.9@106.145,93.208
  Bottom Layer w0.254: 74LS04.12 74LS04.11 100.712,92.582 ; 74LS04.12@98.525,93.37 cw(c99.376,92.518) 99.376,93.722 cw(c99.376,94.926) 74LS04.12@98.525,94.075 ; 74LS04.11@100.359,93.37 ccw(c99.508,92.518) 99.508,93.722 ccw(c99.508,94.926) 74LS04.11@100.359,94.075 ; 74LS04.9 105.792,92.584 ; 100.712,92.582 cw(c101.423,92.582) 101.005,93.157 ccw(c101.423,92.582) 100.712,92.582 ; 100.712,92.582 ccw(c100.001,92.582) 100.419,93.157 cw(c100.001,92.582) 100.712,92.582 ; 100.712,92.582 101.219,92.075 105.283,92.075 105.792,92.584 ; 105.792,92.584 cw(c106.499,92.584) 106.084,93.156 ccw(c106.499,92.584) 105.792,92.584 ; 105.792,92.584 ccw(c105.085,92.584) 105.5,93.156 cw(c105.085,92.584) 105.792,92.584
NetU1_13: 74LS04.13 NE555.3 | length 32.1
  Bottom Layer w0.254: 74LS04.13@95.279,93.208 cw(c94.428,92.356) 95.632,92.356 cw(c96.836,92.356) 74LS04.13@95.985,93.208 ; 74LS04.13 95.632,90.804 97.155,89.281 116.713,89.281 117.984,88.01 NE555.3 ; NE555.3@117.643,86.621 ccw(c116.819,87.445) 117.984,87.445 ccw(c119.149,87.445) NE555.3@118.325,86.621
VCC: 74LS04.14 P1.8 Q1.3 R1.2 R4.1 R7.2 R9.1 R10.2 VCC.1 | length 201.2
  Top Layer w0.254: 74LS04.14@92.739,94.237 ccw(c91.888,95.088) 93.092,95.088 ccw(c94.296,95.088) 74LS04.14@93.445,94.237 ; 74LS04.14@93.092,93.062 cw(c93.092,91.767) 94.007,92.683 ; 74LS04.14@93.092,93.316 cw(c93.092,92.635) 93.574,93.116 ; 74LS04.14@93.591,93.561 ccw(c94.704,93.561) 93.917,92.773 ; P1.8@97.064,82.34 ccw(c96.001,81.277) 96.001,82.781 ccw(c96.001,84.285) P1.8@97.064,83.222 ; P1.8@97.244,82.52 ccw(c96.614,81.89) 96.614,82.781 ccw(c96.614,83.672) P1.8@97.244,83.042 ; P1.8 95.4,82.781 94.488,83.693 94.488,92.202 93.092,93.598 74LS04.14 93.092,95.124 93.853,95.885 130.937,95.885 133.477,93.345 133.477,82.296 R10.2 134.62,75.819 R9.1 ; R9.1@132.08,73.598 ccw(c132.08,74.368) 132.625,73.824 ccw(c133.169,73.279) R9.1@132.399,73.279 ; R9.1@132.08,73.852 ccw(c132.08,75.235) 133.058,74.257 ccw(c134.036,73.279) R9.1@132.653,73.279 ; R10.2@134.047,81.153 ccw(c132.664,81.153) 133.642,82.131 ccw(c134.62,83.109) R10.2@134.62,81.726 ; R10.2@134.215,80.748 cw(c133.237,79.77) 134.62,79.77 cw(c136.003,79.77) R10.2@135.025,80.748 ; R10.2@134.301,81.153 ccw(c133.531,81.153) 134.075,81.698 ccw(c134.62,82.242) R10.2@134.62,81.472 ; R10.2@134.394,80.927 cw(c133.85,80.383) 134.62,80.383 cw(c135.39,80.383) R10.2@134.846,80.927
  Bottom Layer w0.254: R1.2@78.335,72.874 ccw(c77.357,71.896) 77.357,73.279 ccw(c77.357,74.662) R1.2@78.335,73.684 ; R1.2@78.514,73.053 ccw(c77.97,72.509) 77.97,73.279 ccw(c77.97,74.049) R1.2@78.514,73.505 ; R1.2@78.74,73.598 ccw(c78.74,74.368) 79.285,73.824 ccw(c79.829,73.279) R1.2@79.059,73.279 ; R1.2@78.74,73.852 ccw(c78.74,75.235) 79.718,74.257 ccw(c80.696,73.279) R1.2@79.313,73.279 ; R4.1@85.787,73.279 ccw(c84.404,73.279) 85.382,74.257 ccw(c86.36,75.235) R4.1@86.36,73.852 ; R4.1@85.955,72.874 cw(c84.977,71.896) 86.36,71.896 cw(c87.743,71.896) R4.1@86.765,72.874 ; R4.1@86.041,73.279 ccw(c85.271,73.279) 85.815,73.824 ccw(c86.36,74.368) R4.1@86.36,73.598 ; R4.1@86.134,73.053 cw(c85.59,72.509) 86.36,72.509 cw(c87.13,72.509) R4.1@86.586,73.053 ; Q1.3@92.144,70.722 ccw(c91.507,70.085) 91.507,70.985 ccw(c91.507,71.886) Q1.3@92.144,71.249 ; Q1.3@92.648,70.718 cw(c92.053,70.104) 92.908,70.104 ; 74LS04.14@92.739,93.37 ccw(c91.888,92.518) 91.888,93.722 ccw(c91.888,94.926) 74LS04.14@92.739,94.075 ; 74LS04.14 80.514,93.722 75.438,88.646 75.438,74.295 76.454,73.279 R1.2 80.772,75.311 84.328,75.311 R4.1 86.36,71.755 87.13,70.985 Q1.3 92.908,70.104 ; Q1.3@93.167,70.718 ccw(c93.762,70.104) 92.908,70.104 ; VCC.1@102.175,69.155 ccw(c101.112,68.092) 101.112,69.596 ccw(c101.112,71.1) VCC.1@102.175,70.037 ; VCC.1@102.355,69.335 ccw(c101.725,68.705) 101.725,69.596 ccw(c101.725,70.487) VCC.1@102.355,69.857 ; VCC.1 93.416,69.596 92.908,70.104 ; R7.2@127,80.58 cw(c127,79.197) 127.978,80.175 cw(c128.956,81.153) R7.2@127.573,81.153 ; R7.2@127,80.834 cw(c127,80.064) 127.545,80.608 cw(c128.089,81.153) R7.2@127.319,81.153 ; R7.2 128.905,79.248 132.715,79.248 R10.2 ; R10.2@134.047,81.153 cw(c132.664,81.153) 133.642,80.175 cw(c134.62,79.197) R10.2@134.62,80.58 ; R10.2@134.301,81.153 cw(c133.531,81.153) 134.075,80.608 cw(c134.62,80.064) R10.2@134.62,80.834

## Silkscreen, mask and mechanical layers (free items; w line width, h text height)
Top Overlay:
  drawing of 1199 lines, arcs and shapes, not listed
  text "*" at 90.551,92.964 h1.02
  text "*" at 110.617,92.964 h1.02
  text "*" at 124.714,88.392 h1.02
  text "*" at 116.967,83.693 h1.02
  text "IN" at 103.886,71.247 h1.02
  text "OUT" at 106.68,71.247 h1.02
  text "GND" at 111.887,69.088 h1.02
  text "SN:090531" at 125.857,67.691 h1.02
Mechanical 1:
  lines w0.254: 70.739,67.668 71.247,66.144 ; 70.739,94.846 71.247,96.37 ; 70.993,66.144 71.501,66.144 ; 70.993,96.37 71.501,96.37 ; 71.247,73.233 71.247,66.144 ; 71.247,89.281 71.247,96.37 ; 71.755,67.668 71.247,66.144 ; 71.755,94.846 71.247,96.37 ; 73.684,98.878 73.685,99.386 ; 75.208,98.621 73.684,99.132 ; 75.209,99.637 73.684,99.132 ; 97.919,99.086 73.684,99.132 ; 115.236,99.052 139.47,99.005 ; 137.946,98.5 139.47,99.005 ; 137.947,99.516 139.47,99.005 ; 139.47,98.751 139.471,99.259 ; 139.954,93.98 139.954,95.377 138.811,96.52 137.541,96.52 76.454,96.52 75.184,96.52 75.057,96.393 73.787,95.123 73.787,93.853 73.787,68.834 73.787,67.31 74.93,66.167 76.327,66.167 137.541,66.167 138.811,66.167 139.954,67.31 139.954,68.58 139.954,94.107
  text "65.7861 (mm)" at 98.171,98.171 h1.52 r359.89
  text "30.226 (mm)" at 72.161,73.487 h1.52 r90